# EAGLE board Buck Regulator (EAGLE 9.6.2)
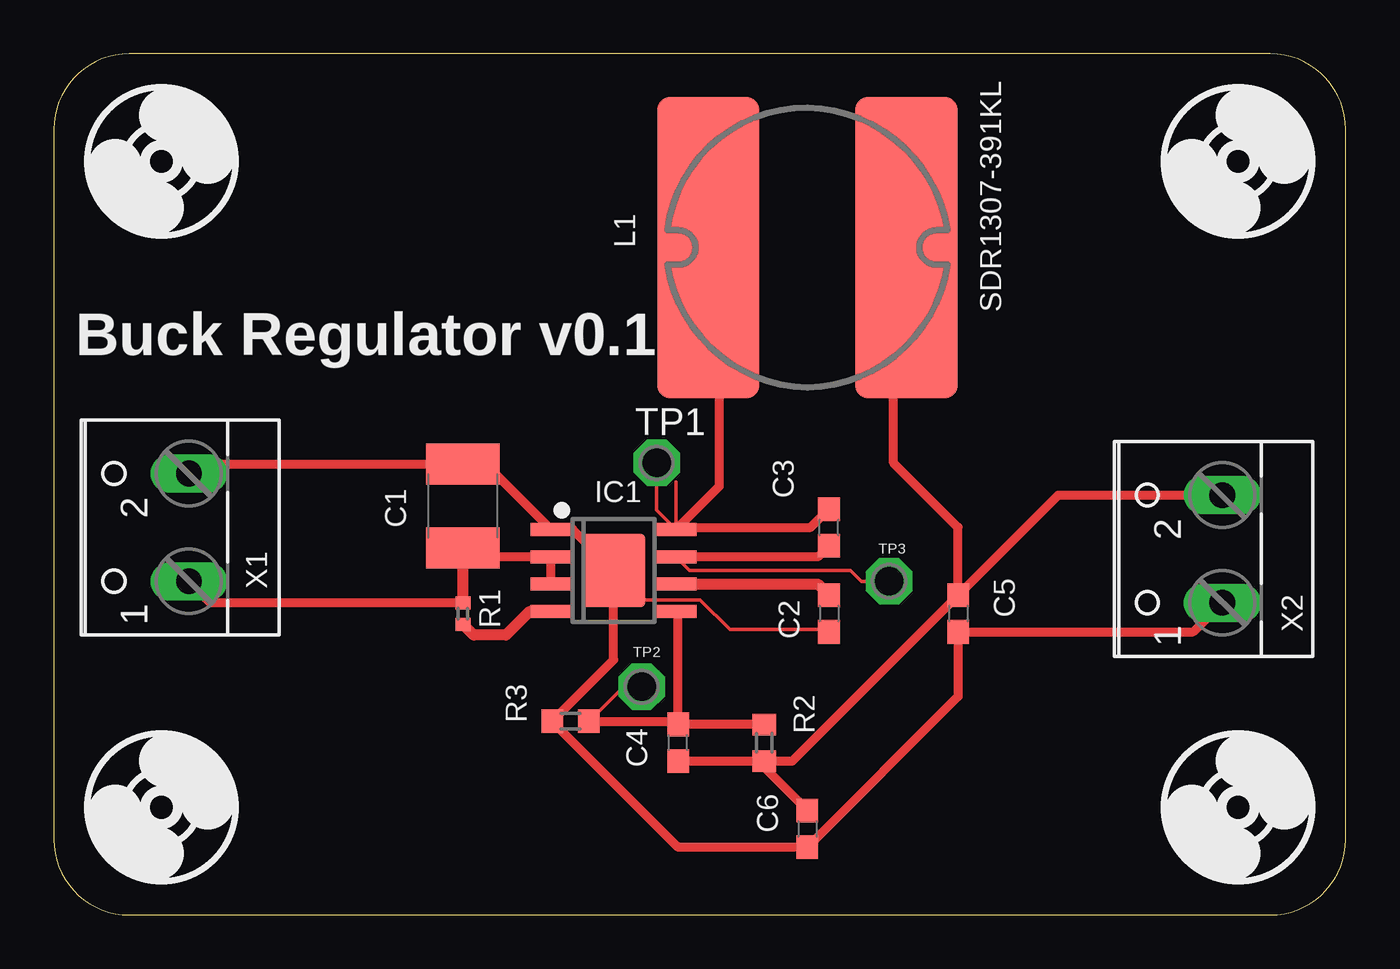
[diagram p0: board, top side]
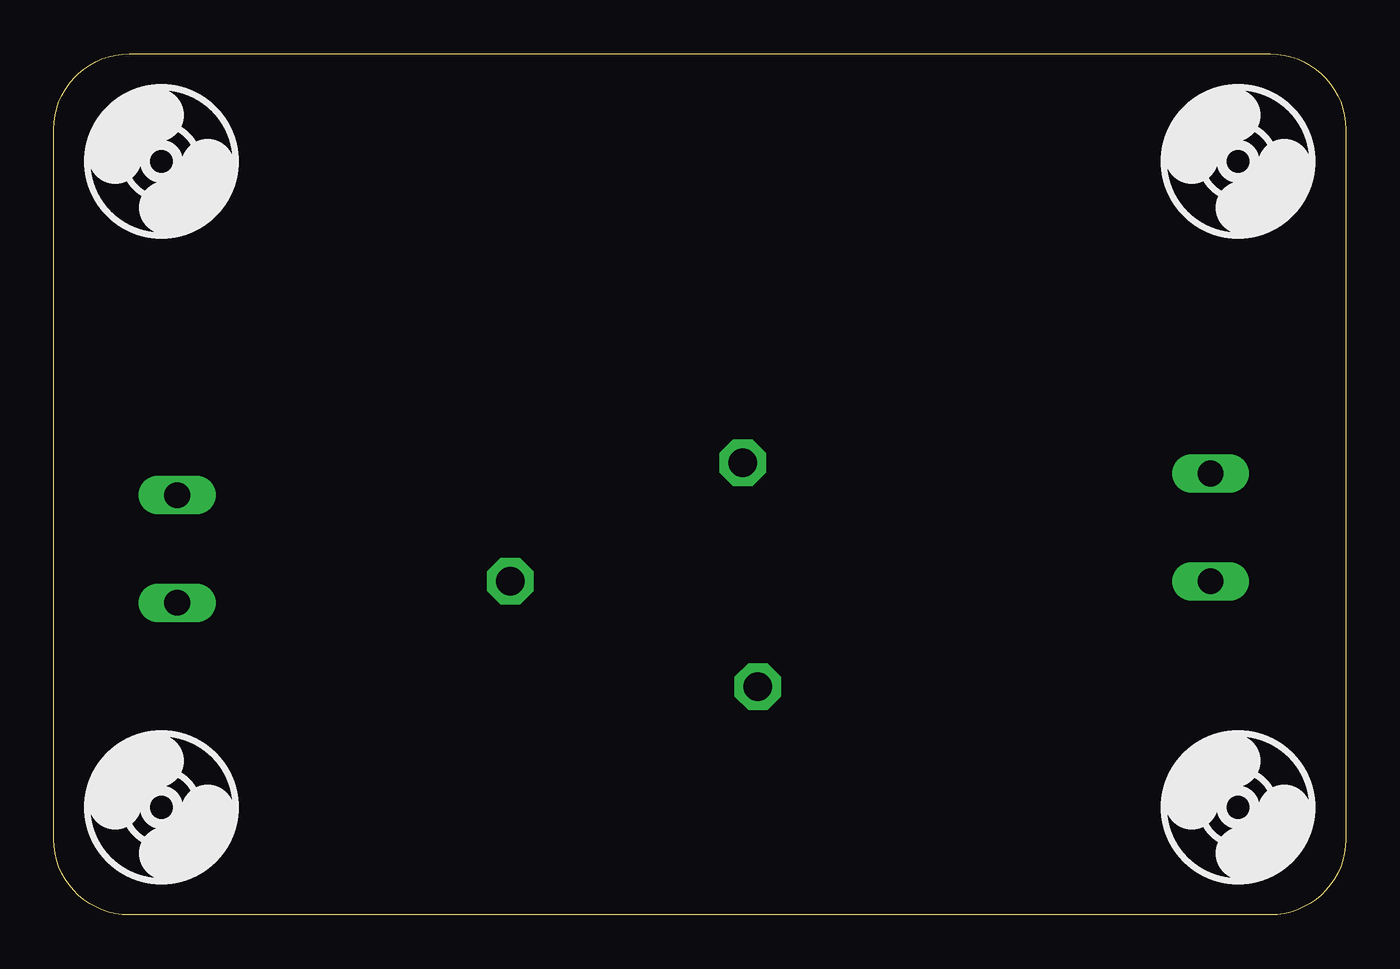
[diagram p1: board, bottom side, seen from below]

Size 60 x 40 mm. Coordinates in mm from the lower left corner, seen from the top.
Outline: 0,36.5 0,3.5 arc90 3.5,0 56.5,0 arc90 60,3.5 60,36.5 arc90 56.5,40 3.5,40 arc90 0,36.5
Copper layers (1*16): Top 0.035mm / dielectric 1.5mm / Bottom 0.035mm
Design rules "default": minimum track width 6mil, minimum drill 0.35mm, track to track 6mil, track to pad 6mil, pad to pad 6mil, via to via 6mil, smd to smd 6mil, copper to edge 40mil, drill to drill 6mil, minimum pad ring 10mil, minimum via ring 8mil, stop-mask expansion 4mil, vias tented up to drill 0mil, thermal gap 10mil

## Footprints (pad centres in the part's own frame; a part is rotated, then mirrored left to right if it is on the bottom)
C1812 = smd 1.9 x 3.4: 1 -1.95,0; 2 1.95,0
C0603 = smd 1.1 x 1: 1 -0.85,0; 2 0.85,0
3,2 = hole 3.2: 0,0
SO-08-EP = smd 0.6 x 1.9: 1 -1.905,-2.9; 2 -0.635,-2.9; 3 0.635,-2.9; 4 1.905,-2.9; 5 1.905,2.9; 6 0.635,2.9; 7 -0.635,2.9; 8 -1.905,2.9 | smd 3.4 x 2.95: 9 0,0
SDR1307-391KL = smd 14 x 4.75: 1 0,4.6; 2 0,-4.6
R0402 = smd 0.6 x 0.7: 1 -0.5,0; 2 0.5,0
R0603 = smd 1 x 1.1: 1 -0.85,0; 2 0.85,0
P1-13 = drill 1.321 pad 2.159 octagon: TP 0,0
W237-102 = drill 1.194 long: 1 -2.5,-1.27; 2 2.5,-1.27

## Placement (x,y rotation side)
C1  2.2uF/150V  [C1812]  19,19 90 top
C2  1uF  [C0603]  36,14 270 top
C3  10nF  [C0603]  36,18 90 top
C4  4.7nF  [C0603]  29,8 90 top
C5  4.7uF  [C0603]  42,14 270 top
C6  4.7uF  [C0603]  35,4 270 top
H1  MOUNT-HOLE3.2  [3,2]  5,35 0 top
H2  MOUNT-HOLE3.2  [3,2]  55,35 0 top
H3  MOUNT-HOLE3.2  [3,2]  55,5 0 top
H4  MOUNT-HOLE3.2  [3,2]  5,5 0 top
IC1  LM5017  [SO-08-EP]  26,16 270 top
L1  SDR1307-391KL  [SDR1307-391KL]  35,31 90 top
R1  499k  [R0402]  19,14 270 top
R2  8.79kΩ  [R0603]  33,8 270 top
R3  1kΩ  [R0603]  24,9 0 top
TP1  PTR1PAD1-13  [P1-13]  28,21 0 top
TP2  PTR1PAD1-13  [P1-13]  27.3,10.6 0 top
TP3  PTR1PAD1-13  [P1-13]  38.8,15.5 0 top
X1  [W237-102]  5,18 90 top
X2  [W237-102]  53,17 90 top

## Library data of the parts
C1-C6 = rcl; SPICEPREFIX: C
H1-H4 = _nanolabs_layout
IC1 = _nanolabs_ic
L1 = _nanolabs_rcl
R1-R3 = rcl; SPICEPREFIX: R
TP1-TP3 = testpad
X1 X2 = con-wago-500; MPN: 237-102; OC_FARNELL: unknown; OC_NEWARK: 70K9898

## Nets
+12V: C4.1 C5.1 C6.1 L1.2 R2.2 X2.2
FB: C4.2 IC1.5 R2.1 R3.2 TP2.TP
GND: C1.2 C2.2 C5.2 C6.2 IC1.1 IC1.9 R3.1 X1.2 X2.1
N$23: C2.1 IC1.6
N$28: C3.1 IC1.7 TP3.TP
N$29: C3.2 IC1.8 L1.1 TP1.TP
N$31: IC1.4 R1.2
VIN_HV: C1.1 IC1.2 IC1.3 R1.1 X1.1

## Tracks (layer width: path | path; a pad name or v marks a point on that pad's centre or on a via)
+12V
  Top 0.152: 34.97,4.94 C6.1 | 41.91,14.78 C5.1 42.06,14.94 | 39.64,29.19 39.64,30 39.64,30.94 L1.2
  Top 0.406: C5.1 41.82,15.03 | C5.1 46.65,19.5 X2.2 | 39,31 39,30.64 39.32,30.32 | 39.32,30.32 39.64,30 | C4.1 R2.2 | C6.1 33,6.85 R2.2 | R2.2 34.3,7.15 C5.1 | C5.1 42,18 39,21 39,30 39.32,30.32
  Top 0.508: C6.1 34.85,5
FB
  Top 0.152: 28.96,14.02 IC1.5 | 24.99,9.12 24.93,9.07 R3.2 26.45,10.6 TP2.TP | 28.96,9.12 28.96,8.97 C4.2 28.96,9.12
  Top 0.406: R2.1 C4.2 29,13.99 IC1.5 | R3.2 28.83,9 28.96,9.12
  Top 0.508: 28.9,8.95 C4.2 28.78,9.07
GND
  Top 0.152: 25.76,15.09 25.76,15.54 IC1.9 26.36,15.7 27.43,14.63 30.02,14.63 31.39,13.26 35.97,13.26 C2.2 | 23.16,9.12 R3.1 23.16,8.97
  Top 0.406: X1.2 6.72,20.95 18,20.95 | X2.1 52.92,13.15 C5.2 42,10.15 C6.2 29,3.15 R3.1 26,11.85 IC1.9 24.09,17.91 IC1.1 20.05,20.95 C1.2
  Top 0.508: 18,20.95 C1.2
N$23
  Top 0.152: 35.97,14.94 C2.1 | 28.96,15.24 IC1.6
  Top 0.508: IC1.6 35.48,15.37 C2.1
N$28
  Top 0.152: TP3.TP 37.5,15.5 37,16 29.54,16 IC1.7
  Top 0.406: C3.1 35.48,16.64 IC1.7
  Top 0.508: C3.1 35.92,17.07
N$29
  Top 0.152: 28.96,17.98 IC1.8 | 31.72,29.41 31.11,30.02 31.08,30.06 L1.1 | IC1.8 28.9,20.1 | IC1.8 28,18.8 TP1.TP
  Top 0.406: 31.08,30.06 30.9,29.88 30.9,19.91 IC1.8 29,18 35.15,18 C3.2
  Top 1.016: 30.9,30.5 L1.1
N$31
  Top 0.508: IC1.4 22.09,14.1 21,13 19.5,13 R1.2
VIN_HV
  Top 0.406: X1.1 7.27,14.5 R1.1 | 20,16.64 IC1.2 IC1.3
  Top 0.508: 20,16.64 19.41,16.64 19.02,17.02 | 19.02,17.02 C1.1 19,17 | R1.1 19,17 | 19,17 19.02,17.02

## Text on the board
tPlace: Buck Regulator v0.1